# Altium PCB urbanturbine_rev3.PcbDoc
Units mil, origin at the board's own origin, x right, y up, seen from the top; angles counter-clockwise.
Board outline 2940 x 3300 mil, 2 copper layers (Top Layer, Bottom Layer); 43 components, 47 nets, 173 pads, 15 vias.
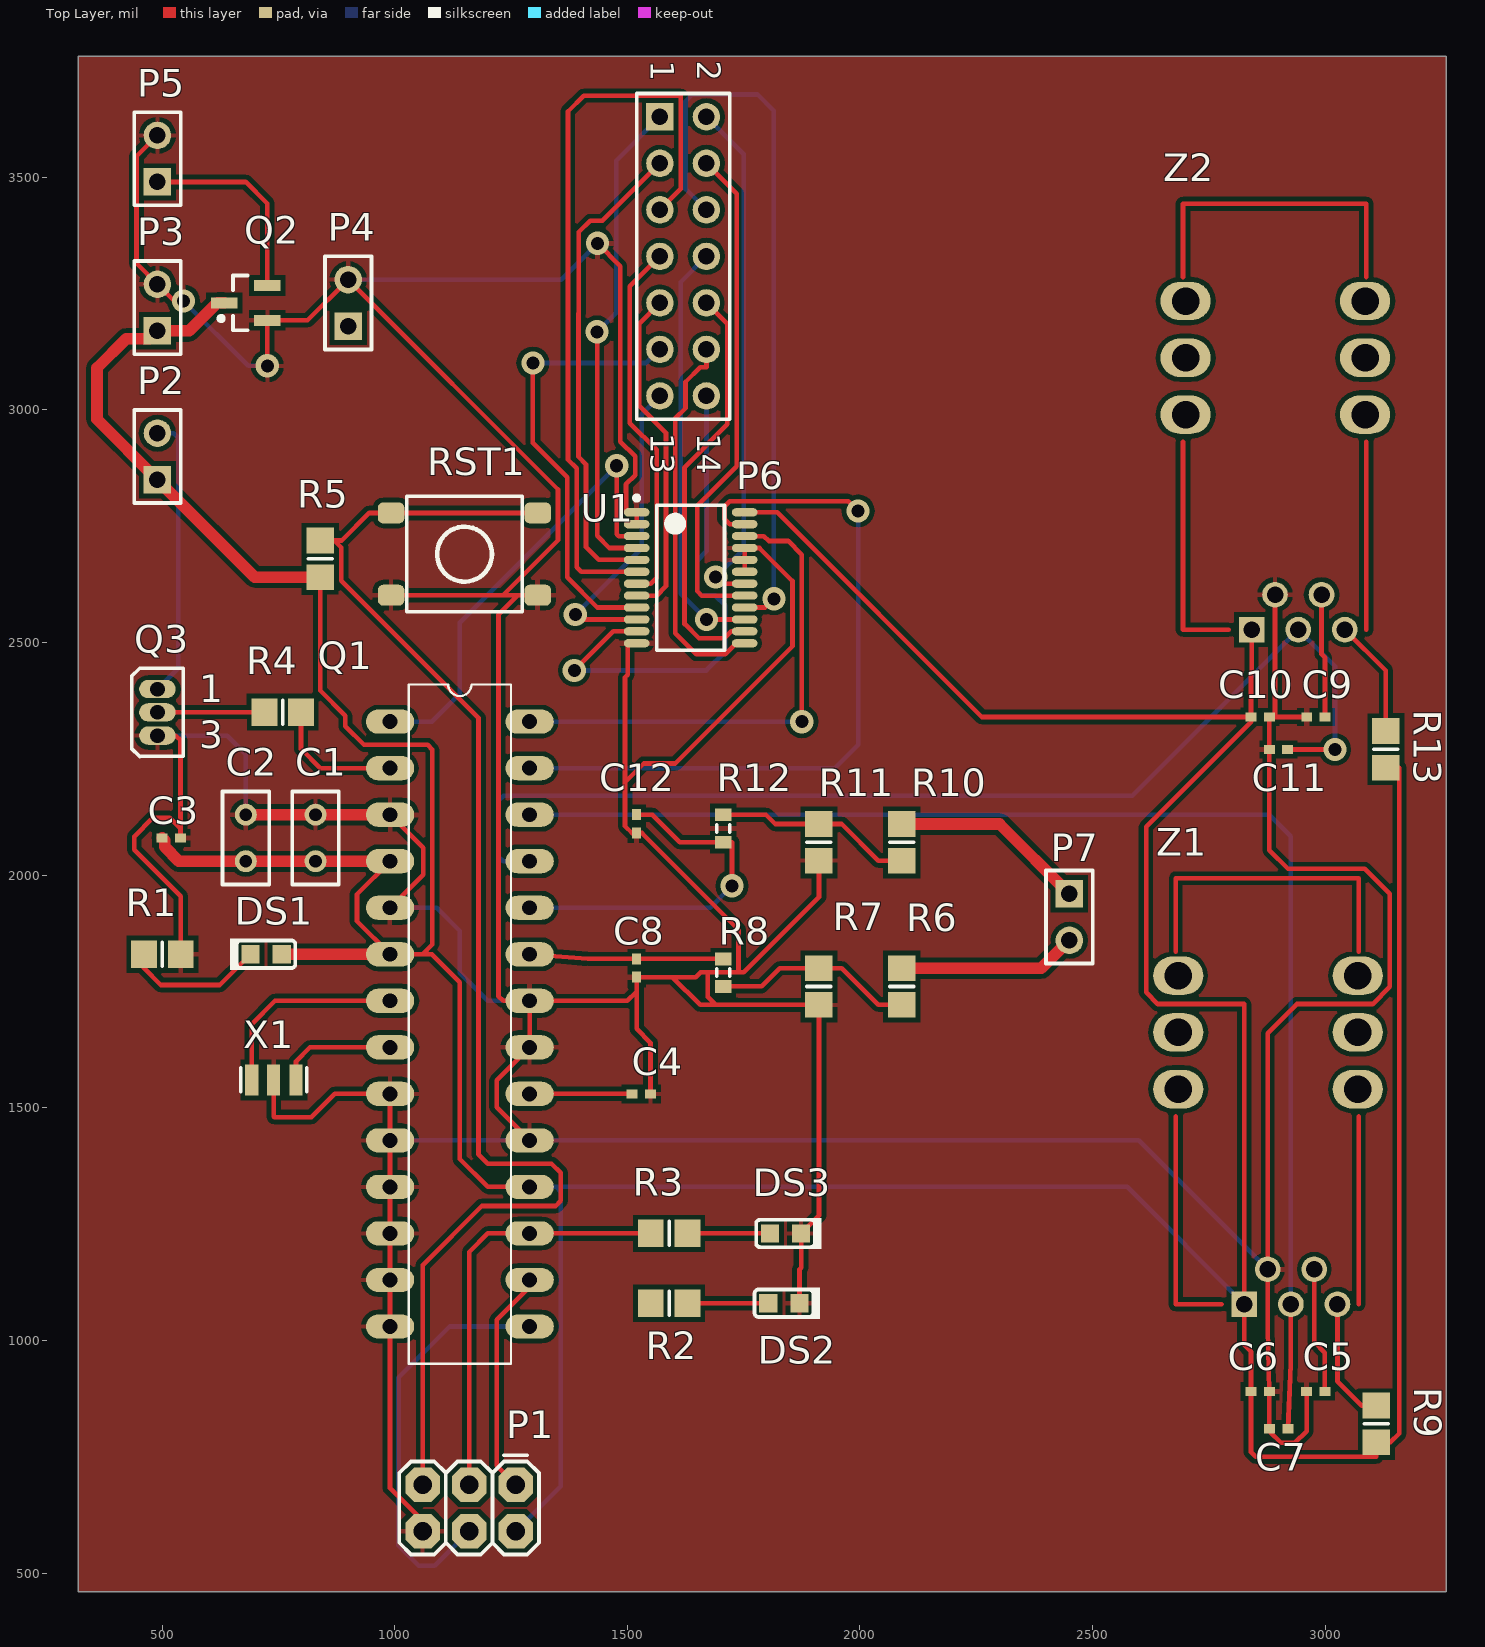
[diagram p0: Top Layer view]
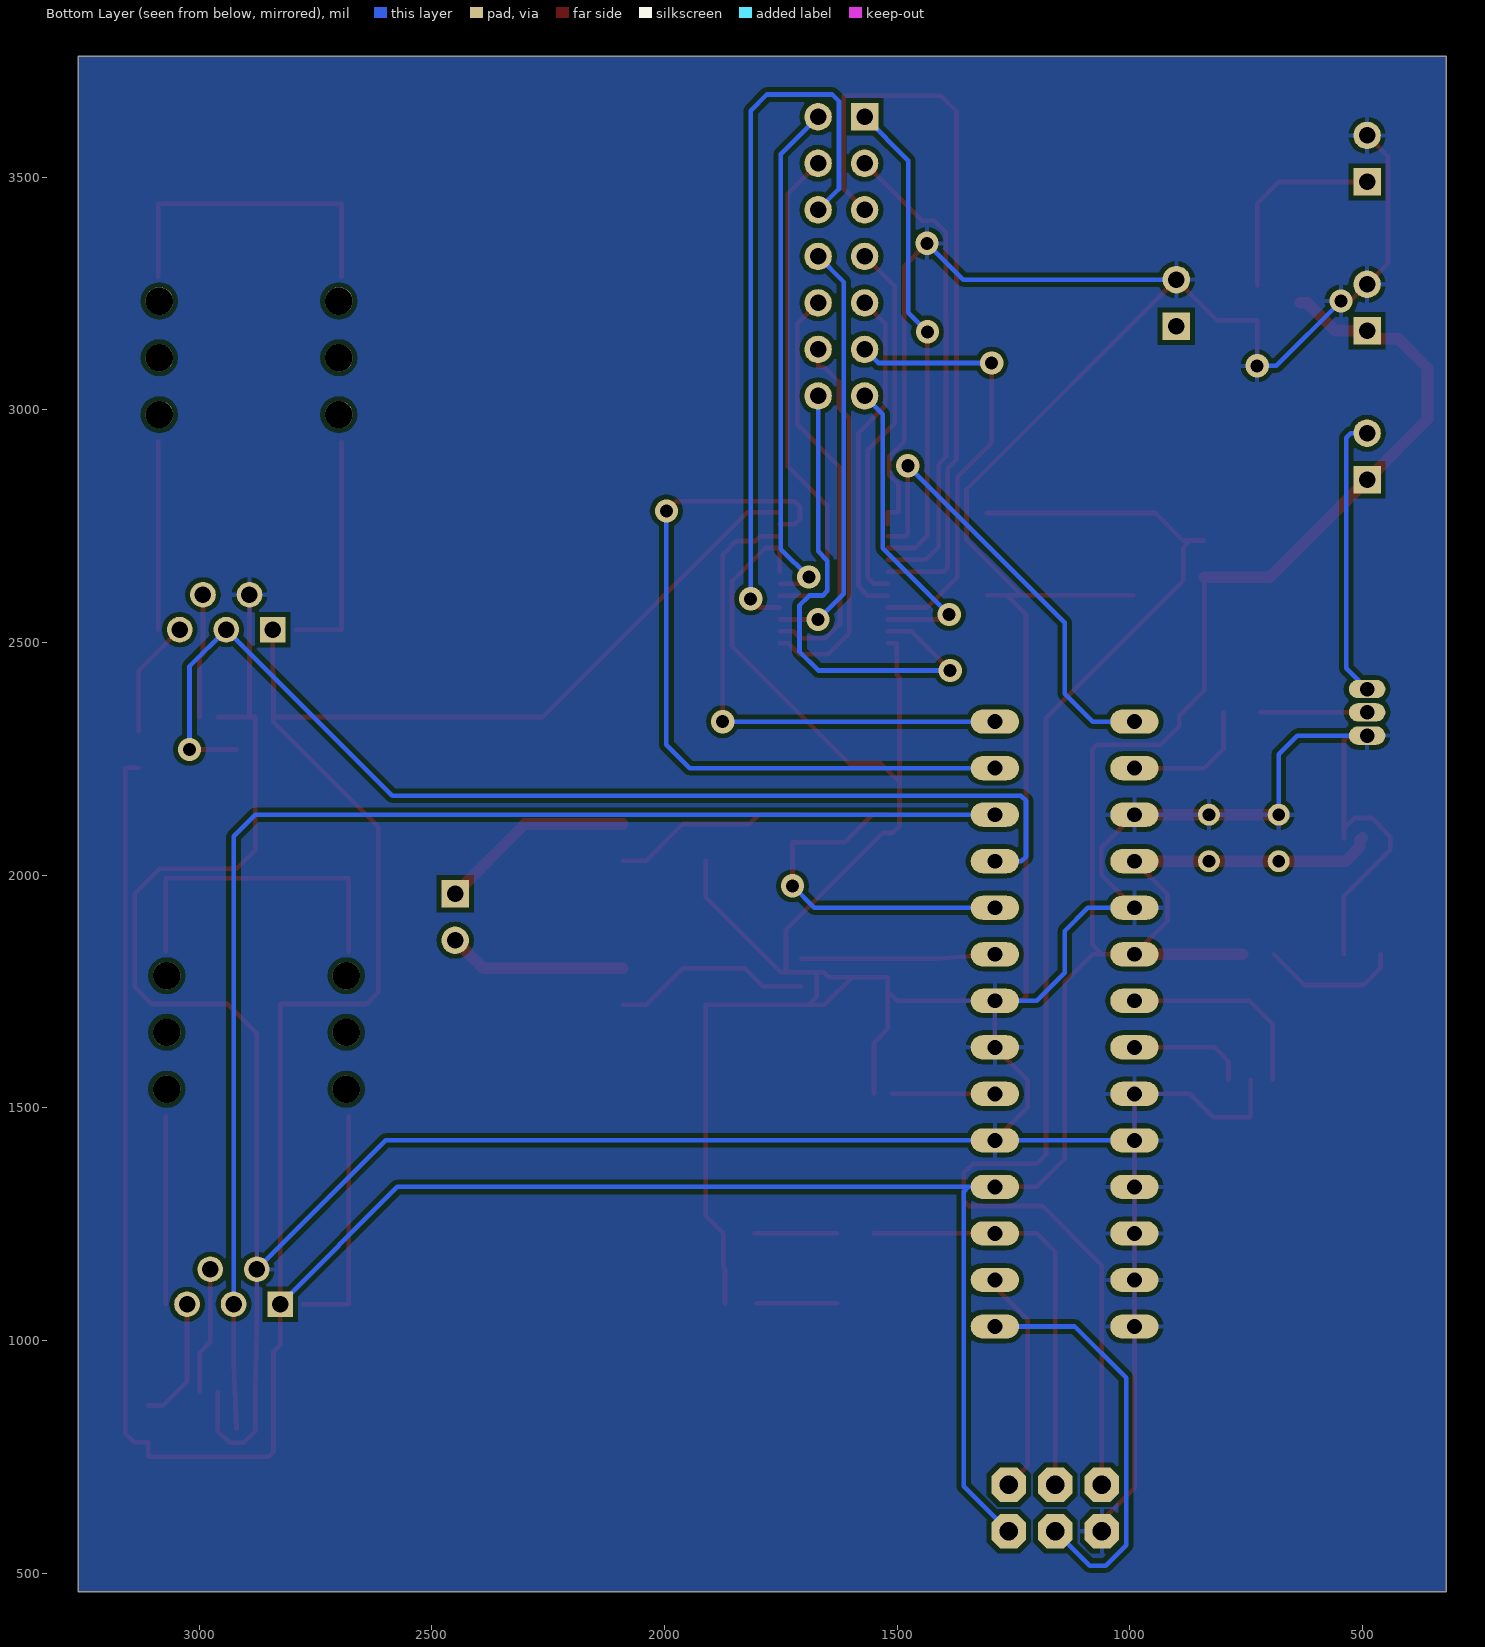
[diagram p1: Bottom Layer view, seen from below]

## Layer stack, top to bottom
Top Solder: solder mask 0.4, Solder Resist, Dk 3.5
Top Layer: signal copper 1.4
Dielectric 1: dielectric 12.6, FR-4, Dk 4.8
Bottom Layer: signal copper 1.4
Bottom Solder: solder mask 0.4, Solder Resist, Dk 3.5

## Board outline
320,460 320,3760 3260,3760 3260,460

## Design rules (kind name [scope] priority, off if disabled: settings)
Clearance [All] p1: gap=10
MinimumSolderMaskSliver [All] p1: minsoldermaskwidth=5
PolygonConnect [All] p1: connectstyle=Relief reliefconductorwidth=10 reliefentries=4 polygonreliefangle="90 Angle" airgapwidth=10
RoutingVias [All] p1: holewidth=28 width=50 viastyle="Through Hole" minholewidth=28 minwidth=50 maxholewidth=28 maxwidth=50
SolderMaskExpansion [All] p1: expansion=4
Width [All] p1: maxlimit=25 minlimit=10 preferedwidth=10 minimp=50.000000 maximp=50.000000 favimp=50.000000
29 further rules are at their usual default settings.

## Classes and differential pairs
component class sensors: C5 C6 C7 C8 C9 C10 C11 C12 P7 R6 R7 R8 R9 R10 R11 R12 R13 Z1 Z2
component class urbanturbine: C1 C2 C3 C4 DS1 DS2 DS3 P1 P2 P3 P4 P5 P6 Q1 Q2 Q3 R1 R2 R3 R4 R5 RST1 U1 X1

## Components (designator, comment, footprint, x,y, rotation, side; value= is the part's Value field where it differs from the comment)
C1 "Cap Pol1" RAD-0.1 830,2080 r90 top
C2 "Cap Pol1" RAD-0.1 680,2080 r90 top
C3 "C1005X7R1H104K050BB" 0402 520,2080 r180 top
C4 "C1005X7R1H104K050BB" 0402 1530,1530 r180 top
C5 "Cap Semi" 0402 2979.68,890 r0 top
C6 "Cap Semi" 0402 2860.31,890 r0 top
C7 "Cap Semi" 0402 2900.31,810 r0 top
C8 "Cap Semi" 0402 1520,1800.32 r270 top
C9 "Cap Semi" 0402 2980,2340 r0 top
C10 "Cap Semi" 0402 2860.31,2340 r0 top
C11 "Cap Semi" 0402 2899.68,2270 r0 top
C12 "Cap Semi" 0402 1520,2110.32 r270 top
DS1 "LTST-C191KGKT" KING-LED0603-25-GREEN_V 723.47,1830 r0 top
DS2 "LTST-C191KRKT" KING-LED0603-25-RED_V 1836.53,1080 r180 top
DS3 "LTST-C191KRKT" KING-LED0603-25-RED_V 1840,1230 r180 top
P1 "M20-9980346" 2X3 1260,690 r180 top
P2 "" HDR1X2 490,2850 r90 top
P3 "" HDR1X2 490,3170 r90 top
P4 "" HDR1X2 900,3180 r90 top
P5 "" HDR1X2 490,3490 r90 top
P6 "Header 7X2" HDR2X7 1570,3630 r270 top
P7 "" HDR1X2 2450,1960 r270 top
Q1 "ATMEGA328P-MU" *DIL28 1140,1680 r0 top
Q2 "AP2138N-3.3TRG1" SOT23_M 680,3230 r180 top
Q3 "MOSFET-N" E3 490,2350 r0 top
R1 "RC0603JR-071KL" 6-0805_M 500.63,1830 r0 top
R2 "Res1" 6-0805_M 1590,1080 r0 top
R3 "Res1" 6-0805_M 1590,1230 r0 top
R4 "ERJ-3EKF1002V" 6-0805_M 759.37,2350 r0 top
R5 "Res1" 6-0805_M 840,2680 r90 top
R6 "90k" 6-0805_M 2090,1760.63 r90 top
R7 "10k" 6-0805_M 1911.81,1760.63 r90 top
R8 "ERJ-3EKF1002V" J1-0603 1706.06,1790.47 r270 top
R9 "ERJ-3EKF1002V" 6-0805_M 3110,820.63 r270 top
R10 "90k" 6-0805_M 2090,2070.63 r90 top
R11 "10k" 6-0805_M 1911.81,2070.63 r90 top
R12 "ERJ-3EKF1002V" J1-0603 1706.06,2100.47 r90 top
R13 "ERJ-3EKF1002V" 6-0805_M 3130,2270.63 r270 top
RST1 "PTS645SH50SMTR92 LFS" "TACTILE SWITCH SMD" 1150,2690 r180 top
U1 "TCA9548A" TCA9548A 1636.14,2639.25 r0 top
X1 "16MHz" RESONATOR-SMD 740.37,1560 r0 top
Z1 "LEM HO-25P" HO-25 2777.09,1077.8 r90 top
Z2 "LEM HO-25P" HO-25 2792.91,2527.8 r90 top

## Footprints (in the part's own frame and the unit in brackets; to place one, negate y for a bottom-side part, rotate by r counter-clockwise, add the part's x,y. Pads: shape width x height; smd on the part's side, far side on the other; paste and mask are expansions set on the pad)
2X3 [mil] "2X3"
  oct 74x74 hole 40: 1(0,0) 2(0,100) 3(100,0) 4(100,100) 5(200,0) 6(200,100)
  silkscreen extent -50,-63 250,150, body extent -50,-49 250,149, height 335
6-0805_M [mm] "Chip Resistor, Body 2.0x1.2mm, IPC Low Density"
  rect 1.4x1.5 smd: 1(-1,0) 2(1,0)
  silkscreen extent 0,-0.65 0,0.65, body extent -1.07,-0.7 1.07,0.7, height 0.7
0402 [mm] "Chip Capacitor, Body 1.0x0.5mm, IPC High Density"
  rect 0.6x0.5 smd: 1(-0.5,0) 2(0.5,0)
  body extent -0.55,-0.3 0.55,0.3, height 1.3
*DIL28 [mil]
  oval 104x52 hole 32: 1(-150,650) 2(-150,550) 3(-150,450) 4(-150,350) 5(-150,250) 6(-150,150) 7(-150,50) 8(-150,-50) 9(-150,-150) 10(-150,-250) 11(-150,-350) 12(-150,-450) 13(-150,-550) 14(-150,-650) 15(150,-650) 16(150,-550) 17(150,-450) 18(150,-350) 19(150,-250) 20(150,-150) 21(150,-50) 22(150,50) 23(150,150) 24(150,250) 25(150,350) 26(150,450) 27(150,550) 28(150,650)
  silkscreen extent -110,-730 110,730, body extent -315,-730 110,730, height 314
E3 [mm] "TO, Flat Index; 3 In-Line, Axial Leads; Body Dia. 4.6mm; Lead Dia. 0.5 mm (max)"
  oval 2x1 hole 0.8: 1(0,1.27) 2(0,0) 3(0,-1.27)
  silkscreen extent -1.41,-2.41 1.41,2.41
HDR1X2 [mm] "Connector; Header; 2 Position"
  rect 1.5x1.5 hole 0.9: 1(0,0)
  round 1.5 hole 0.9: 2(2.54,0)
  silkscreen extent -1.27,-1.27 3.81,1.27
HDR2X7 [mm] "Connector; Header; 7x2 Position"
  rect 1.5x1.5 hole 0.9: 1(0,0)
  round 1.5 hole 0.9: 2(0,2.54) 3(2.54,0) 4(2.54,2.54) 5(5.08,0) 6(5.08,2.54) 7(7.62,0) 8(7.62,2.54) 9(10.16,0) 10(10.16,2.54) 11(12.7,0) 12(12.7,2.54) 13(15.24,0) 14(15.24,2.54)
  silkscreen extent -1.27,-1.27 16.51,3.81
HO-25 [mm]
  rect 1.4x1.4 / inner rect 2.5x1.4 / far side rect 1.4x1.4 hole 0.9: 1(0,-1.25)
  round 1.4 / inner oval 2.5x1.4 / far side round 1.4 hole 0.9: 2(1.905,-2.52) 3(0,-3.79) 4(1.905,-5.06) 5(0,-6.33)
  oval 2.1x2.74 / inner round 1.5 / far side round 1.5 hole 1.5: ""(11.74,-7.44) ""(11.74,2.36) ""(14.84,-7.44) ""(14.84,2.36) ""(17.94,-7.44) ""(17.94,2.36)
  Top Layer lines w0.254: 10.25,2.5 0,2.5 0,0 ; 19.25,2.5 23.25,2.5 23.25,-7.5 19.25,-7.5 ; 0,-7.5 10.25,-7.5
  body extent -0.22,-8.5 23.72,3.5, height 20.8
J1-0603 [mm] "Chip Resistor, Body 1.6x0.8mm, IPC High Density"
  rect 0.7x0.9 smd: 1(-0.75,0) 2(0.75,0)
  silkscreen extent -0.2,-0.35 0.2,0.35, body extent -0.85,-0.48 0.85,0.48, height 0.9
KING-LED0603-25-GREEN_V [mm] "LED, SMT, Body 1.6 x 0.8 mm, 0.25mm Thickness"
  rect 1x1 smd paste+0 mask+0: 1(0.85,0) 2(-0.85,0)
  silkscreen extent -1.97,-0.85 1.6,0.85, body extent -0.8,-0.4 0.8,0.4, height 0.25
KING-LED0603-25-RED_V [mm] "LED, SMT, Body 1.6 x 0.8 mm, 0.25mm Thickness"
  rect 1x1 smd paste+0 mask+0: 1(0.85,0) 2(-0.85,0)
  silkscreen extent -1.97,-0.85 1.6,0.85, body extent -0.8,-0.4 0.8,0.4, height 0.25
RAD-0.1 [mm] "Radial Cap, Thru-Hole; 2 Leads; 0.1 in Pin Spacing"
  round 1.2 hole 0.7: 1(-1.27,0) 2(1.27,0)
  silkscreen extent -2.54,-1.27 2.54,1.27
RESONATOR-SMD [mil] "RESONATOR-SMD"
  rect 28x67 smd: 1(-47.62,0) 2(-0.38,0) 3(47.62,0)
  silkscreen extent -71,-26 71,26
SOT23_M [mm] "SOT23, 3-Leads, Body 2.9x1.3mm, Pitch 0.95mm, Lead Span 2.3mm - Reverse Pinning, IPC Low Density"
  rect 1.45x0.6 smd: 1(1.175,0) 2(-1.175,-0.95) 3(-1.175,0.95)
  silkscreen extent -0.1,-1.5 1.47,1.5, body extent -0.7,-1.5 0.7,1.5, height 1.1
"TACTILE SWITCH SMD" [mil] "Switch, Through-Hole, 4 Leads, Body 8.5x8.5mm, Row Spacing 9.0mm, Pitch 4.5mm"
  rrect50% 57x45 smd: 1(157.87,-88.58) 2(-157.48,-88.58) 3(157.87,88.19) 4(-157.48,88.19)
  silkscreen extent -124,-124 124,124, body extent -177,-122 177,122, height 177
TCA9548A [mm] "TSOP, 24-Leads, Body 7.80x4.40mm, Pitch 0.65mm, IPC Medium Density"
  oval 1.4x0.45 smd: 1(-2.95,3.575) 2(-2.95,2.925) 3(-2.95,2.275) 4(-2.95,1.625) 5(-2.95,0.975) 6(-2.95,0.325) 7(-2.95,-0.325) 8(-2.95,-0.975) 9(-2.95,-1.625) 10(-2.95,-2.275) 11(-2.95,-2.925) 12(-2.95,-3.575) 13(2.95,-3.575) 14(2.95,-2.925) 15(2.95,-2.275) 16(2.95,-1.625) 17(2.95,-0.975) 18(2.95,-0.325) 19(2.95,0.325) 20(2.95,0.975) 21(2.95,1.625) 22(2.95,2.275) 23(2.95,2.925) 24(2.95,3.575)
  silkscreen extent -3.07,-3.95 1.85,4.47, body extent -3.27,-3.96 3.28,3.93, height 1.2

## Part data
C1 C2 C3 C4 C5 C6 C7 C8 C9 C10 C11 C12: library part Cap, "Capacitor"
DS1 DS2 DS3: library part LED1, "Typical RED GaAs LED"
P1: "DIL VERTICAL PC TAIL PIN HEADER"
P2: library part "Header 4", "Header, 4-Pin"
P3 P4 P7: library part "Header 2", "Header, 2-Pin"
P5: library part "Header 4X2", "Header, 4-Pin, Dual row"
P6: "Header, 7-Pin, Dual row"
Q1: "IC MCU 8BIT 32KB FLASH 32QFN"
Q2: "IC REG LINEAR 3.3V 250MA SOT23-3"
Q3: "N-Channel MOSFET"
R1 R2 R3 R4 R5 R6 R7 R8 R9 R10 R11 R12 R13: library part Res2, "Resistor"
RST1: "SWITCH TACTILE SPST-NO 0.05A 12V"
U1: "IIC multiplexor"
X1: library part CSTNE16M0VH3C000R0, "CER RESONATOR 16MHZ SMD"
Z1 Z2: "Hall Effect Current Sensor"

## Via types
v1: diameter 50, hole 28, Top Layer to Bottom Layer, 15 vias

## Nets (pads, with @x,y where several pads share a name; then routed paths per layer and width w, separated by ;. In a path a pad name is that pad's centre, name@x,y a point inside that pad or via, vN(x,y) a via of type N, cw(c..) or ccw(c..) an arc to the next point about the centre after c; other vN are vias at no path point)
3.3V: P5.1 Q2.2 | length 431.8
  Top Layer w10: P5.1 680,3490 726.26,3443.74 Q2.2
+5: C1.1 C2.1 C3.2 C6.1 C10.1 DS1.1 P1.2 P2.1 P3.1 Q1.4 Q1.6 Q1.18 Q2.1 R5.1 R9.2 R13.2 U1.24 Z1.1 Z2.1 | length 11383.7
  Top Layer w10: R5.1 840,2397 894,2343 894,2320 934,2280 1071,2280 1081,2270 1081,1851 1060,1830 ; Q1.4 919,1959 919,1901 Q1.6 1060,1830 ; Q1.18 1200,1330 1140,1390 1140,1770 1080,1830 1060,1830 ; U1.24 1822,2780 2262,2340 C10.1 ; Z2.1 2842.13,2434.5 2840.63,2433 C10.1 ; R13.2 3159,2231.26 3159,800 3140.26,781.26 R9.2 3110,750 2850.63,750 2840.63,760 C6.1 2840.63,976 2826.3,990.33 Z1.1 2826.3,1722.7 2826,1723 2640,1723 2615,1748 2615,2104 2840.63,2329.63 C10.1
  Top Layer w25: C3.2 505.38,2074.94 505.38,2060.84 536.21,2030 C2.1 C1.1 Q1.4 ; Q2.1 618.39,3230 558.39,3170 P3.1 472.97,3152.97 422.97,3152.97 360,3090 360,2980 P2.1 699.37,2640.63 R5.1 ; DS1.1 Q1.6
  Bottom Layer w10: P1.2 1357,687 1357,1320 1347,1330 ; Q1.18 1347,1330 ; Z1.1 2574.1,1330 1347,1330
BME_C: P6.6 U1.16 | length 1581.8
  Top Layer w10: U1.16 1796.28,2575.28 v1(1815,2594)
  Bottom Layer w10: P6.6 1625,3475 1625,3663 1640,3678 1780,3678 1815,3643 v1(1815,2594)
BME_D: P6.8 U1.15 | length 908.2
  Top Layer w10: v1(1670,2549.69) U1.15
  Bottom Layer w10: v1(1670,2549.69) 1615,2604.69 1615,3275 P6.8
COMP_IN: P4.1
CRANK_C: P6.10 U1.14 | length 895.1
  Top Layer w10: P6.10 1715,3185 1715,2969 1623,2877 1623,2540 1654,2509 1708,2509 1723.09,2524.09 U1.14
CRANK_CURRENT: C11.2 Q1.25 Z2.3 | length 2454.7
  Top Layer w10: C11.2 v1(3021,2270)
  Bottom Layer w10: Q1.25 1233,2030 1223,2040 1223,2160 1234,2171 2585.33,2171 Z2.3 3021,2448.92 v1(3021,2270)
CRANK_D: P6.12 U1.13 | length 823
  Top Layer w10: P6.12 1670,3092 1657,3092 1625,3060 1625,3004 1603,2982 1603,2520 1648,2475 1710.5,2475 1734,2498.5 U1.13
CRANK_IN_+: P7.2 R6.2 | length 384.9
  Top Layer w25: R6.2 2390,1800 P7.2
CRANK_VOLTAGE: C8.1 Q1.23 R8.1 | length 416.5
  Top Layer w10: Q1.23 1415,1820 C8.1 R8.1
DISPLAY_GND: P2.2 Q3.1 | length 607.8
  Bottom Layer w10: Q3.1 535,2445 535,2940 525,2950 P2.2
DISPLAY_TOGGLE: Q1.2 R4.2 | length 287.1
  Top Layer w10: R4.2 798.74,2271.26 840,2230 Q1.2
GND: C1.2 C2.2 C3.1 C4.1 C5.1 C6.2 C7.1 C8.2 C9.1 C10.2 C11.1 C12.2 DS2.2 DS3.2 P1.6 P3.2 P4.2 P5.2 Q1.3 Q1.5 Q1.9 Q1.10 Q1.11 Q1.12 Q1.13 Q1.14 Q1.19 Q1.21 Q1.22 Q2.3 Q3.3 R1.2 R7.1 R11.1 RST1.3 RST1.4 U1.1 U1.2 U1.12 U1.19 U1.20 U1.21 X1.2 Z1.2 Z2.2 | length 16331.5
  Top Layer w10: Q3.3 529.69,2300 539.69,2290 539.69,2100 ; P5.2 445,3545 445,3315 P3.2 525.82,3234.18 v1(545.82,3234.18) ; C3.1 539.69,2100 ; R1.2 540,1955 440,2055 440,2083 480,2123 516.69,2123 539.69,2100 ; v1(726.26,3094.78) Q2.3 812.6,3192.6 P4.2 1351,2829 1351,2720 1232.81,2601.81 ; X1.2 739.99,1481.01 741,1480 821,1480 871,1530 Q1.9 Q1.10 Q1.11 Q1.12 Q1.13 Q1.14 990,682 1060,612 P1.6 ; Q1.5 1061,2001 1061,2059 Q1.3 ; RST1.3 1232.81,2601.81 ; Q1.19 1219,1501 1219,1559 Q1.21 Q1.22 ; RST1.4 1264.81,2601.81 ; v1(1436,3358) 1485,3309 1485,2932 1517,2900 1517,2860 1497,2840 1497,2780 U1.1 U1.2 ; U1.12 1501,2498.5 1501,2431 1495,2425 1495,2200 ; C4.1 1549.69,1640 1520,1669.69 1520,1750 ; U1.19 U1.20 U1.21 1783.93,2703.23 1855,2632.16 1855,2492 1603,2240 1535,2240 1495,2200 ; DS2.2 1870,1153 1873.47,1156.47 DS3.2 1911.81,1268.34 R7.1 1690,1721.26 ; R11.1 1911.81,1952.81 1750,1791 1739,1791 ; C7.1 C7.1@2880,810 ; Z2.2 2892.13,2340 ; C5.1 2960,805 2935,780 2905,780 2880,805 C7.1@2880,810 ; C9.1 2892.13,2340 ; 1232.81,2601.81 1264.81,2601.81 ; 1264.81,2601.81 1223,2560 1223,1740 1233,1730 Q1.22 ; Q1.22 1500,1730 1520,1750 ; 1495,2200 1495,2105.63 1510,2090.63 C12.2 1531.37,2090.63 1739,1883 1739,1791 ; 1520,1750 C8.2 1597,1780.63 ; 1597,1780.63 1656.37,1721.26 1690,1721.26 ; 1597,1780.63 1647,1780.63 1657.37,1791 1673,1791 ; 1673,1791 1673,1738.26 1690,1721.26 ; 1673,1791 1739,1791 ; C7.1@2880,810 C6.2 2876.3,1024.7 Z1.2 2876.3,1660.3 2939,1723 3102,1723 3139,1760 3139,1960 3085,2014 2920,2014 2880,2054 C11.1 C10.2 2892.13,2340
  Top Layer w25: C2.2 C1.2 Q1.3
  Bottom Layer w10: Q3.3 640,2300 680,2260 C2.2 ; v1(545.82,3234.18) 685.22,3094.78 v1(726.26,3094.78) ; P4.2 1358,3280 v1(1436,3358) ; Q1.10 Q1.19 2599.1,1430 Z1.2 ; Q1.5 1090,1930 1140,1880 1140,1790 1200,1730 Q1.22
HUMIDITY_C: P6.7 U1.7 | length 789.5
  Top Layer w10: U1.7 1550,2626.46 1563,2639.46 1563,2914 1505.47,2971.53 1505.47,3265.47 P6.7
HUMIDITY_D: P6.5 U1.6 | length 1640.3
  Top Layer w10: U1.6 1400.98,2652.05 1391,2662.03 1391,2874.68 1372.49,2893.18 1372.49,3641.49 1406,3675 1615,3675 1615,3475 P6.5
MISO: P1.1 Q1.16 | length 486.4
  Top Layer w10: P1.1 1219,731 1219,1044 1290,1115 Q1.16
MOSI: P1.4 Q1.15 | length 888.4
  Bottom Layer w10: P1.4 1086,516 1052,516 1008,560 1008,920 1118,1030 Q1.15
MUX_RST: Q1.1 U1.3 | length 996.2
  Top Layer w10: v1(1477,2880) 1477,2733 1481.18,2728.82 U1.3
  Bottom Layer w10: Q1.1 1080,2330 1140,2390 1140,2543 v1(1477,2880)
NetC4_2: C4.2 Q1.20 | length 220.3
  Top Layer w10: Q1.20 C4.2
NetC5_2: C5.2 Z1.4 | length 272.4
  Top Layer w10: Z1.4 2976.3,996.7 2999.37,973.63 C5.2
NetC9_2: C9.2 Z2.4 | length 265.9
  Top Layer w10: Z2.4 2992.13,2474.56 2999.69,2467 C9.2
NetDS1_2: DS1.2 R1.1 | length 301
  Top Layer w10: R1.1 461.26,1800 497.26,1764 624,1764 DS1.2
NetDS2_1: DS2.1 R2.2 | length 173.7
  Top Layer w10: R2.2 DS2.1
NetDS3_1: DS3.1 R3.2 | length 177.2
  Top Layer w10: R3.2 DS3.1
NetQ1_7: Q1.7 X1.1 | length 438
  Top Layer w10: X1.1 692.75,1680 742.75,1730 Q1.7
NetQ1_8: Q1.8 X1.3 | length 254.4
  Top Layer w10: X1.3 787.99,1600 817.99,1630 Q1.8
NetQ1_30: R2.1
NetQ3_2: Q3.2 R4.1 | length 230
  Top Layer w10: Q3.2 R4.1
NetR6_1: R6.1 R7.2 R8.2 | length 432.7
  Top Layer w10: R8.2 1789,1760.94 1828.06,1800 R7.2 1961,1800 2039.74,1721.26 R6.1
NetR9_1: R9.1 Z1.5 | length 271
  Top Layer w10: Z1.5 3026.3,912 3078.3,860 R9.1
NetR10_1: R10.1 R11.2 R12.2 | length 424.8
  Top Layer w10: R12.2 1798,2130 1818,2110 R11.2 1961,2110 2039.74,2031.26 R10.1
NetR13_1: R13.1 Z2.5 | length 254.2
  Top Layer w10: Z2.5 3130,2439.92 R13.1
PROX_C: P6.2 U1.18 | length 1115.3
  Top Layer w10: v1(1690,2641) 1704.54,2626.46 U1.18
  Bottom Layer w10: P6.2 1750,3550 1750,2701 v1(1690,2641)
PROX_D: P6.4 U1.17 | length 1087.7
  Top Layer w10: P6.4 1735,3465 1735,2879 1650,2794 1650,2610.87 1660,2600.87 U1.17
RST: P1.5 R5.2 RST1.1 RST1.2 | length 3019.5
  Top Layer w10: R5.2 870,2719.37 ; P1.5 1060,1162 1187,1289 1346,1289 1357,1300 1357,1360 1337,1380 1200,1380 1180,1400 1180,2338 885,2633 885,2704.37 870,2719.37 ; RST1.2 945.21,2778.58 886,2719.37 870,2719.37
SCK: P1.3 Q1.17 R3.1 | length 907.2
  Top Layer w10: P1.3 1160,1190 1200,1230 Q1.17 R3.1
SCL: Q1.28 U1.22 | length 1083.2
  Top Layer w10: U1.22 1793.55,2728.82 1803.93,2718.43 1845.57,2718.43 1875,2689 v1(1875,2330)
  Bottom Layer w10: Q1.28 v1(1875,2330)
SDA: Q1.27 U1.23 | length 1605.4
  Top Layer w10: U1.23 1720,2754.41 1709,2765.41 1709,2793 1720,2804 1975,2804 v1(1996,2783)
  Bottom Layer w10: Q1.27 1946,2230 1996,2280 v1(1996,2783)
SPEED_C: P6.11 U1.9 | length 952.5
  Top Layer w10: v1(1297,3101) 1297,2929 1371,2855 1371,2640 1435.72,2575.28 U1.9
  Bottom Layer w10: v1(1297,3101) 1541,3101 P6.11
SPEED_D: P6.9 U1.8 | length 722.7
  Top Layer w10: U1.8 1563,2600.87 1583,2620.87 1583,2951 1525.47,3008.53 1525.47,3185.47 P6.9
TEMP_C: P6.3 U1.5 | length 1039.7
  Top Layer w10: U1.5 1438.9,2677.64 1411,2705.53 1411,2883.05 1395,2899.05 1395,3207.11 1395.89,3208 1395.89,3382.43 1420,3406.55 1446.55,3406.55 P6.3
TEMP_D: P6.1 U1.4 | length 1052.5
  Top Layer w10: v1(1435,3168) 1435,2729.23 1461,2703.23 U1.4
  Bottom Layer w10: v1(1435,3168) 1476,3209 1476,3536 P6.1
TURBINE_C: P6.14 U1.11 | length 1109.5
  Top Layer w10: v1(1386,2440) 1470.09,2524.09 U1.11
  Bottom Layer w10: v1(1386,2440) 1670,2440 1710,2480 1710,2580 1689,2601 1660,2601 1650,2611 1650,2676 1670,2696 P6.14
TURBINE_CURRENT: C7.2 Q1.26 Z1.3 | length 2929.3
  Top Layer w10: C7.2 2926.3,949.3 Z1.3
  Bottom Layer w10: Q1.26 2880,2130 2926.3,2083.7 Z1.3
TURBINE_D: P6.13 U1.10 | length 681.3
  Top Layer w10: v1(1388.2,2560.2) 1398.71,2549.69 U1.10
  Bottom Layer w10: v1(1388.2,2560.2) 1531,2703 1531,2991 P6.13
TURBINE_IN_+: P7.1 R10.2 | length 422.1
  Top Layer w25: R10.2 2300,2110 P7.1
TURBINE_VOLTAGE: C12.1 Q1.24 R12.1 | length 777.9
  Top Layer w10: C12.1 1553.94,2130 1613,2070.94 R12.1 1725,2070.94 v1(1725,1977)
  Bottom Layer w10: Q1.24 1678,1930 v1(1725,1977)
pads on no net: Z1. Z2.

## Polygon pours and split planes (outlines as drawn)
GND on Top Layer "Top_GND" (solid, pour order 11): 320,460 320,3760 3260,3760 3260,460
GND on Bottom Layer "Bot_GND" (solid, pour order 12): 320,460 320,3760 3260,3760 3260,460

## Silkscreen, mask and mechanical layers (free items; w line width, h text height)
Mechanical 1:
  the board outline again, w10

## Text inside footprints (layer, text, board x,y; h text height)
P6: Top Overlay "13" at 1550,2950 h50 r270; Top Overlay "14" at 1650,2950 h50 r270; Top Overlay "1" at 1550,3750 h50 r270; Top Overlay "2" at 1650,3750 h50 r270
Q3: Top Overlay "3" at 579.57,2272.72 h59.05; Top Overlay "1" at 579.57,2371.85 h59.05